# EAGLE board polarplotter v2 (EAGLE 5.07)
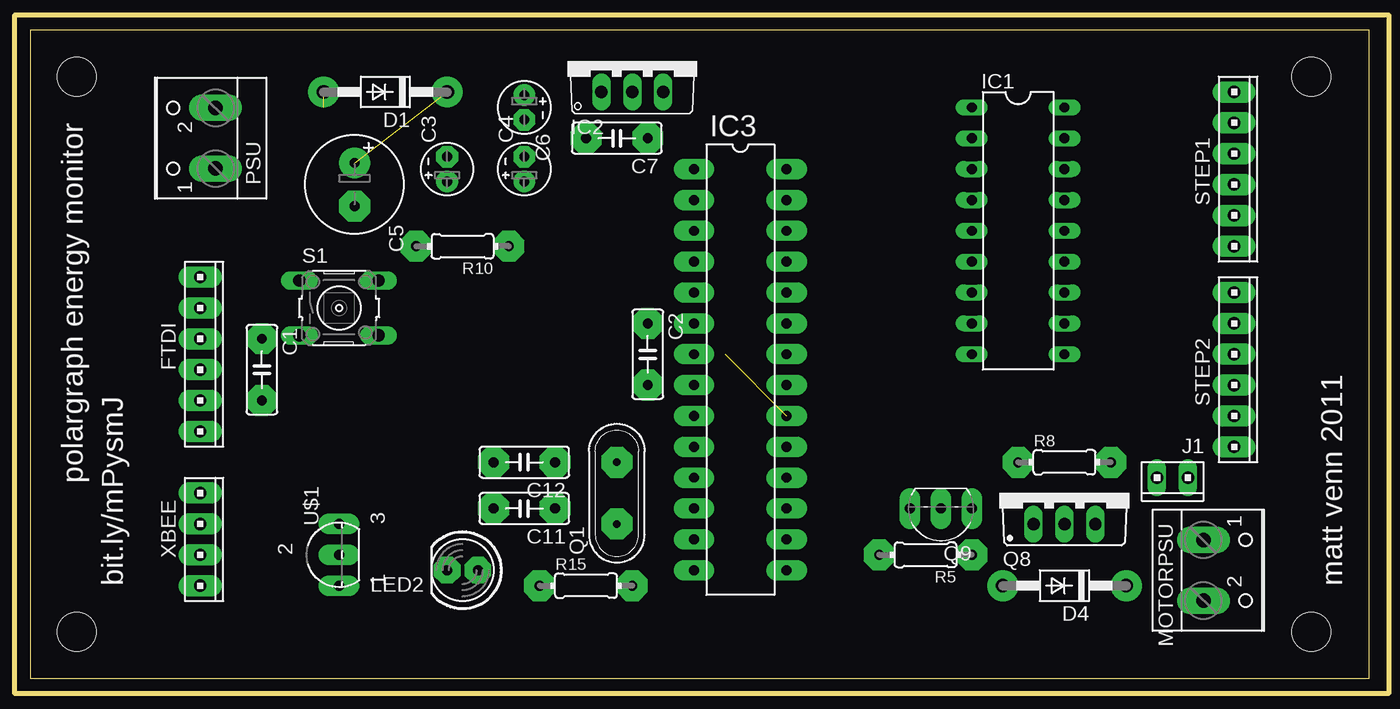
[diagram p0: board, top side]
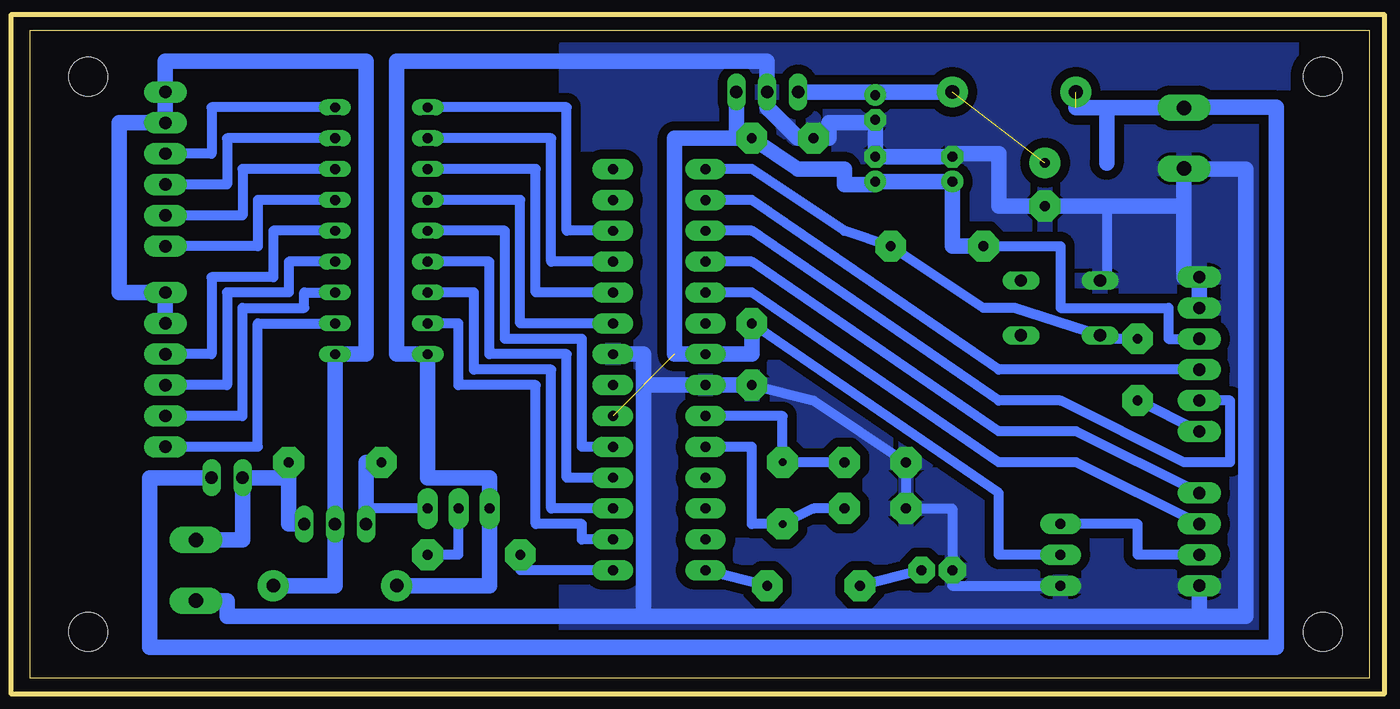
[diagram p1: board, bottom side, seen from below]

Size 110.16 x 53.33 mm. Coordinates in mm from the lower left corner, seen from the top.
Outline: 0,0 110.16,0 110.16,53.33 0,53.33 0,0
Copper layers (1*16): Top 0.035mm / dielectric 1.5mm / Bottom 0.035mm
Design rules "default": minimum track width 10mil, minimum drill 24mil, track to track 8mil, track to pad 8mil, pad to pad 8mil, via to via 8mil, smd to smd 8mil, copper to edge 40mil, drill to drill 8mil, minimum pad ring 10mil, minimum via ring 8mil, stop-mask expansion 4mil, vias tented up to drill 0mil, thermal gap 10mil
Net classes: 1 power: width 2 mm
Holes 3.2 mm at 3.81,3.81 105.41,3.81 105.41,49.53 3.81,49.53
Milling: 4 lines

## Footprints (pad centres in the part's own frame; a part is rotated, then mirrored left to right if it is on the bottom)
C050-025X075 = drill 0.813 pad 2.54 octagon: 1 -2.54,0; 2 2.54,0
E2-4 = drill 0.813 pad 1.778 round: + -1.016,0 | drill 0.813 pad 1.778 octagon: - 1.016,0
E3,5-8 = drill 0.813 pad 2.54 round: + -1.778,0 | drill 0.813 pad 2.54 octagon: - 1.778,0
DO41-10 = drill 1.118 pad 2.54 round: A 5.08,0; C -5.08,0
10X06MTA = drill 1.016 pad 1.778 long: 1 6.35,0; 2 3.81,0; 3 1.27,0; 4 -1.27,0; 5 -3.81,0; 6 -6.35,0
DIL18 = drill 0.813 long: 1 -10.16,-3.81; 2 -7.62,-3.81; 3 -5.08,-3.81; 4 -2.54,-3.81; 5 0,-3.81; 6 2.54,-3.81; 7 5.08,-3.81; 8 7.62,-3.81; 9 10.16,-3.81; 10 10.16,3.81; 11 7.62,3.81; 12 5.08,3.81; 13 2.54,3.81; 14 0,3.81; 15 -2.54,3.81; 16 -5.08,3.81; 17 -7.62,3.81; 18 -10.16,3.81
TO220V = drill 1.016 long: 1 -2.54,-2.54; 2 0,-2.54; 3 2.54,-2.54
DIL28-3 = drill 0.813 pad 1.676 long: 1 -16.51,-3.81; 2 -13.97,-3.81; 3 -11.43,-3.81; 4 -8.89,-3.81; 5 -6.35,-3.81; 6 -3.81,-3.81; 7 -1.27,-3.81; 8 1.27,-3.81; 9 3.81,-3.81; 10 6.35,-3.81; 11 8.89,-3.81; 12 11.43,-3.81; 13 13.97,-3.81; 14 16.51,-3.81; 15 16.51,3.81; 16 13.97,3.81; 17 11.43,3.81; 18 8.89,3.81; 19 6.35,3.81; 20 3.81,3.81; 21 1.27,3.81; 22 -1.27,3.81; 23 -3.81,3.81; 24 -6.35,3.81; 25 -8.89,3.81; 26 -11.43,3.81; 27 -13.97,3.81; 28 -16.51,3.81
10X02MTA = drill 1.016 long: 1 1.27,0; 2 -1.27,0
LED5MM = drill 0.813 pad 2.184 octagon: A -1.27,0; K 1.27,0
W237-102 = drill 1.194 pad 2.184 long: 1 -2.5,-1.27; 2 2.5,-1.27
QS = drill 0.61 pad 2.54 octagon: 1 -2.54,0; 2 2.54,0
TO220BV = drill 1.016 long: D 0,-2.54; G -2.54,-2.54; S 2.54,-2.54
TO92-EBC = drill 0.813 pad 1.676 long: B 0,-1.27; C -2.54,-1.27; E 2.54,-1.27
0204/7 = drill 0.813 pad 2.54 octagon: 1 -3.81,0; 2 3.81,0
B3F-10XX = drill 1.016 long: 1 -3.251,2.261; 2 3.251,2.261; 3 -3.251,-2.261; 4 3.251,-2.261
TO92 = drill 0.813 pad 1.676 long: 1 -2.54,0; 2 0,0; 3 2.54,0
10X04MTA = drill 1.016 pad 1.778 long: 1 3.81,0; 2 1.27,0; 3 -1.27,0; 4 -3.81,0

## Placement (x,y rotation side)
C1  100n  [C050-025X075]  19.05,25.4 270 top
C2  100n  [C050-025X075]  50.8,26.67 270 top
C3  200uf  [E2-4]  34.29,41.91 90 top
C4  10uf  [E2-4]  40.64,41.91 90 top
C5  200uf  [E3,5-8]  26.67,40.64 270 top
C6  1uf  [E2-4]  40.64,46.99 270 top
C7  0.1uf  [C050-025X075]  48.26,44.45 180 top
C11  22p  [C050-025X075]  40.64,13.97 180 top
C12  22p  [C050-025X075]  40.64,17.78 180 top
D1  1N4004  [DO41-10]  29.21,48.26 180 top
D4  1N4004  [DO41-10]  85.09,7.62 180 top
FTDI  [10X06MTA]  13.97,26.67 270 top
IC1  [DIL18]  81.28,36.83 270 top
IC2  786TV  [TO220V]  49.53,50.8 0 top
IC3  MEGA8-P  [DIL28-3]  58.42,25.4 270 top
J1  [10X02MTA]  93.98,16.51 180 top
LED2  green  [LED5MM]  35.56,8.89 180 top
MOTORPSU  psu  [W237-102]  97.79,8.89 270 top
PSU  psu  [W237-102]  13.97,44.45 90 top
Q1  16mhz  [QS]  48.26,15.24 90 top
Q8  [TO220BV]  85.09,15.24 0 top
Q9  BC548A  [TO92-EBC]  74.93,12.7 180 top
R5  10k  [0204/7]  73.66,10.16 180 top
R8  10k  [0204/7]  85.09,17.78 0 top
R10  10k  [0204/7]  35.56,35.56 180 top
R15  1k  [0204/7]  45.72,7.62 0 top
S1  [B3F-10XX]  25.4,30.48 0 top
STEP1  [10X06MTA]  99.06,41.91 270 top
STEP2  [10X06MTA]  99.06,25.4 270 top
U$1  3V3REG  [TO92]  25.4,10.16 90 top
XBEE  [10X04MTA]  13.97,11.43 270 top

## Library data of the parts
C1-C7 C11 C12 R5 R8 R10 R15 = matt rcl
D1 D4 = matt diode
FTDI J1 STEP1 STEP2 XBEE = matt con-amp
IC1 = uln-udn
IC2 = linear
IC3 = matt atmel
LED2 = matt led
MOTORPSU PSU = matt con-wago-500
Q1 = matt special
Q8 = transistor-power
Q9 = matt transistor-npn
S1 = switch-omron
U$1 = matt

## Nets
+3V3: U$1.3 XBEE.2
+5V: C2.1 C3.+ C4.+ C7.1 FTDI.4 IC2.3 IC3.7 IC3.20 R10.2 U$1.2
+12V [power]: J1.1 MOTORPSU.1 Q8.S R8.2
GND: C2.2 C3.- C4.- C5.- C6.- C7.2 C11.2 C12.2 D4.A FTDI.5 FTDI.6 IC1.9 IC2.2 IC3.8 IC3.22 LED2.K MOTORPSU.2 PSU.1 Q9.E S1.1 U$1.1 XBEE.1
MOTORSUPPLY [power]: D4.C IC1.10 Q8.D STEP1.5 STEP1.6 STEP2.5 STEP2.6
N$1: IC1.18 STEP1.4
N$2 [power]: D1.A J1.2 PSU.2
N$4: IC1.17 STEP1.3
N$5: C1.2 FTDI.1
N$6: IC1.16 STEP1.2
N$7: IC1.15 STEP1.1
N$8: IC1.14 STEP2.4
N$9: IC1.13 STEP2.3
N$10: C11.1 IC3.10 Q1.1
N$11: C12.1 IC3.9 Q1.2
N$12: IC1.12 STEP2.2
N$13: IC1.11 STEP2.1
N$15: LED2.A R15.1
N$17: Q8.G Q9.C R8.1
N$18: Q9.B R5.1
N$19: C5.+ C6.+ D1.C IC2.1
PWM: IC3.15 R5.2
RESET: C1.1 IC3.1 R10.1 S1.3
RX: FTDI.3 IC3.2
STATUS_LED: IC3.14 R15.2
STEP1_1: IC1.1 IC3.26
STEP1_2: IC1.2 IC3.25
STEP1_3: IC1.3 IC3.24
STEP1_4: IC1.4 IC3.23
STEP2_1: IC1.5 IC3.19
STEP2_2: IC1.6 IC3.18
STEP2_3: IC1.7 IC3.17
STEP2_4: IC1.8 IC3.16
TX: FTDI.2 IC3.3
XBEE-RX: IC3.4 XBEE.4
XBEE-TX: IC3.5 XBEE.3

## Tracks (layer width: path | path; a pad name or v marks a point on that pad's centre or on a via)
+3V3
  Bottom 0.813: XBEE.2 19.05,10.16 19.05,12.7 U$1.3
+5V  (1 unrouted)
  Bottom 0.406: 40.64,40.64 C4.+
  Bottom 0.813: R10.2 25.4,35.56 25.4,30.48 16.51,30.48 16.51,27.94 FTDI.4 | U$1.2 30.48,10.16 30.48,15.24 C2.1
  Bottom 1.27: C2.1 50.8,26.67 IC3.7 57.15,26.67 57.15,44.45 C7.1 | C4.+ C3.+ 34.29,35.56 R10.2 | C7.1 46.99,41.91 43.18,41.91 43.18,40.64 40.64,40.64 | C7.1 52.07,44.45 IC2.3
+12V
  Bottom 1.27: Q8.S 88.9,12.7 88.9,16.51 | 88.9,16.51 R8.2 | 88.9,16.51 J1.1 92.71,11.39 MOTORPSU.1
GND
  Bottom 0.406: 34.29,43.18 C3.- | 15.24,41.91 PSU.1 | C6.- 40.64,45.72 | 21.59,32.74 S1.1
  Bottom 0.813: U$1.1 34.29,7.62 LED2.K 34.29,13.97 C11.2 C12.2 45.72,22.86 C2.2 | 21.59,38.86 21.59,32.74
  Bottom 1.27: FTDI.5 FTDI.6 15.24,33.02 15.24,38.86 | 15.24,38.86 21.59,38.86 C5.- 30.48,38.86 30.48,43.18 34.29,43.18 | PSU.1 15.24,38.86 | C2.2 IC3.8 59.69,24.13 | C3.- C4.- C6.- | MOTORPSU.2 93.98,6.39 93.98,5.08 59.69,5.08 | D4.A 72.39,7.62 Q9.E 72.39,16.51 77.47,16.51 IC1.9 80.01,26.67 80.01,50.8 49.53,50.8 IC2.2 49.53,46.99 46.99,44.45 C7.2 44.45,44.45 44.45,45.72 40.64,45.72 | 13.97,5.08 10.16,5.08 10.16,41.91 15.24,41.91 | 13.97,5.08 59.69,5.08 | 13.97,5.08 XBEE.1 | IC3.22 59.69,26.67 59.69,24.13 | 59.69,5.08 59.69,24.13
  pour Bottom (isolate 0.762): 1.27,52.07 66.04,52.07 66.04,1.27 1.27,1.27
MOTORSUPPLY
  Bottom 1.27: D4.C 85.09,7.62 Q8.D IC1.10 82.55,26.67 82.55,50.8 99.06,50.8 STEP1.6 STEP1.5 102.87,45.72 102.87,31.75 STEP2.6 STEP2.5
N$1
  Bottom 0.813: IC1.18 95.25,46.99 95.25,43.18 STEP1.4
N$2  (1 unrouted)
  Bottom 0.406: 15.24,46.99 PSU.2
  Bottom 1.27: PSU.2 21.59,46.95 | 21.59,46.95 24.13,46.95 | 21.59,46.95 21.59,42.42 | J1.2 100.33,16.51 100.33,2.54 7.62,2.54 7.62,46.99 15.24,46.99
N$4
  Bottom 0.813: IC1.17 93.98,44.45 93.98,40.64 STEP1.3
N$5
  Bottom 0.813: FTDI.1 C1.2
N$6
  Bottom 0.813: IC1.16 92.71,41.91 92.71,38.1 STEP1.2
N$7
  Bottom 0.813: IC1.15 91.44,39.37 91.44,35.56 STEP1.1
N$8
  Bottom 0.813: IC1.14 90.17,36.83 90.17,33.02 95.25,33.02 95.25,26.67 STEP2.4
N$9
  Bottom 0.813: STEP2.3 93.98,24.13 93.98,31.75 88.9,31.75 88.9,34.29 IC1.13
N$10
  Bottom 0.813: IC3.10 50.8,19.05 50.8,12.7 Q1.1 45.72,13.97 C11.1
N$11
  Bottom 0.813: IC3.9 48.26,21.59 Q1.2 C12.1
N$12
  Bottom 0.813: IC1.12 87.63,31.75 87.63,30.48 92.71,30.48 92.71,21.59 STEP2.2
N$13
  Bottom 0.813: STEP2.1 91.44,19.05 91.44,29.21 IC1.11
N$15
  Bottom 0.813: LED2.A R15.1
N$17
  Bottom 0.813: Q9.C 82.55,13.97
  Bottom 1.27: R8.1 82.55,17.78 82.55,13.97 Q8.G
N$18
  Bottom 0.813: R5.1 74.93,10.16 Q9.B
N$19  (1 unrouted)
  Bottom 0.406: 40.64,48.26 C6.+
  Bottom 1.27: D1.C 40.64,48.26 IC2.1
PWM
  Bottom 0.813: IC3.15 69.85,8.89 R5.2
RESET
  Bottom 0.406: 22.15,27.94 S1.3
  Bottom 0.813: C1.1 22.15,27.94 | S1.3 29.21,30.48 31.75,30.48 R10.1 43.18,36.83 50.8,41.91 IC3.1
RX
  Bottom 0.813: IC3.2 50.8,39.37 30.48,25.4 FTDI.3
STATUS_LED
  Bottom 0.813: R15.2 IC3.14
STEP1_1
  Bottom 0.813: IC3.26 66.04,36.83 66.04,46.99 IC1.1
STEP1_2
  Bottom 0.406: IC1.2 74.93,44.45
  Bottom 0.813: IC3.25 67.31,34.29 67.31,44.45 IC1.2
STEP1_3
  Bottom 0.813: IC3.24 68.58,31.75 68.58,41.91 IC1.3
STEP1_4
  Bottom 0.813: IC3.23 69.85,29.21 69.85,39.37 IC1.4
STEP2_1
  Bottom 0.813: IC1.5 71.12,36.83 71.12,27.94 64.77,27.94 64.77,19.05 IC3.19
STEP2_2
  Bottom 0.813: IC1.6 72.39,34.29 72.39,26.67 66.04,26.67 66.04,16.51 IC3.18
STEP2_3
  Bottom 0.813: IC3.17 67.31,13.97 67.31,25.4 73.66,25.4 73.66,31.75 IC1.7
STEP2_4
  Bottom 0.813: IC1.8 74.93,29.21 74.93,24.13 68.58,24.13 68.58,12.7 64.77,12.7 64.77,11.43 IC3.16
TX
  Bottom 0.813: IC3.3 50.8,36.83 30.48,22.86 25.4,22.86 15.24,17.78 11.43,17.78 11.43,22.86 FTDI.2
XBEE-RX
  Bottom 0.813: IC3.4 50.8,34.29 30.48,20.32 24.13,20.32 XBEE.4
XBEE-TX
  Bottom 0.813: IC3.5 50.8,31.75 30.48,17.78 24.13,17.78 XBEE.3

## Text on the board
tPlace: polargraph energy monitor | bit.ly/mPysmJ | matt venn 2011